# Altium PCB L-LRMAM36-FANN4-DK01_PCB.PcbDoc (part 3 of 3)
Units mm, origin at the board's own origin, x right, y up, seen from the top; angles counter-clockwise.
Board outline 54 x 90 mm, 4 copper layers (Top Layer, GND, VCC, Bottom Layer), stack 1.59 mm thick; 276 components, 168 nets, 833 pads, 804 vias.
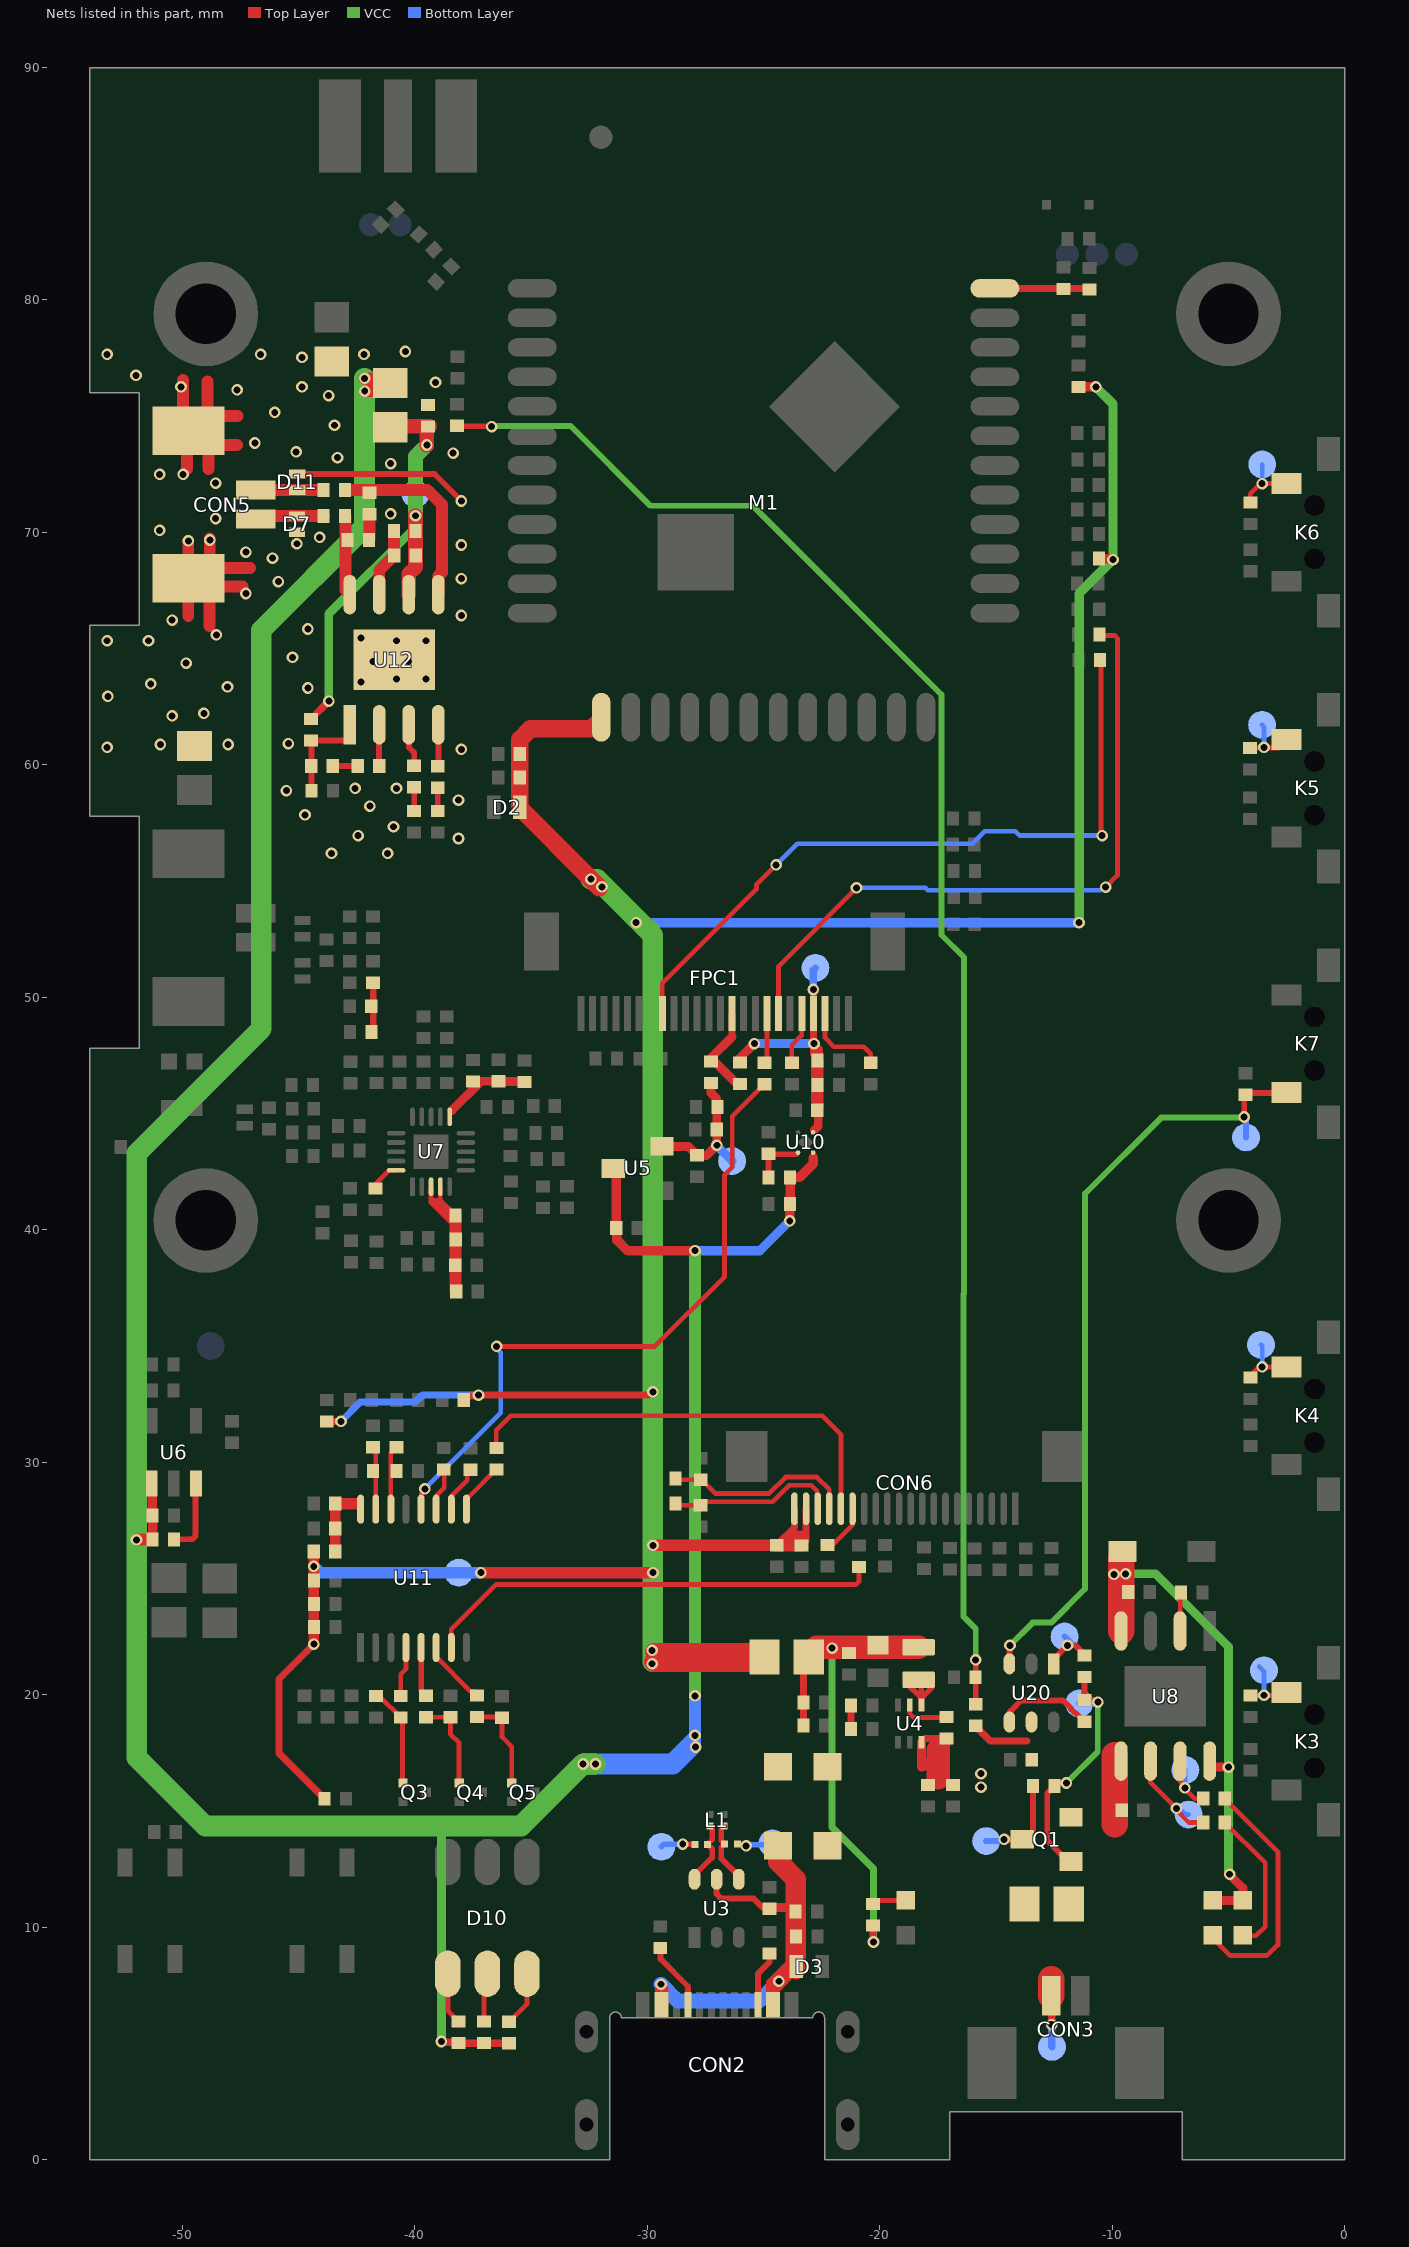
[diagram p5: the nets of this part, all layers, seen from the top]

## Via types
v1: diameter 0.5, hole 0.3, Top Layer to Bottom Layer, tented both sides, 804 vias

## Nets (pads, with @x,y where several pads share a name; then routed paths per layer and width w, separated by ;. In a path a pad name is that pad's centre, name@x,y a point inside that pad or via, vN(x,y) a via of type N, cw(c..) or ccw(c..) an arc to the next point about the centre after c; other vN are vias at no path point) (continued)
NetC45_2: C45.2 C46.2 C47.2 R53.2 U7.3 U7.4 | length 9.6
  Top Layer w0.203: U7.3@-39.306,41.857 -39.306,41.17 ; -39.172,41.184 -38.617,40.63 ; -39.01,41.215 C47.2@-38.455,40.66 ; U7.4@-38.906,41.857 -38.906,41.27 ; -38.196,40.06 -38.248,40.112 -38.751,40.615 ; -39.306,41.17 -39.206,41.27 -38.906,41.27 ; -39.306,41.17 -38.751,40.615 ; -38.906,41.27 C47.2@-38.251,40.615 -38.751,40.615
  Top Layer w0.508: C47.2@-38.251,40.615 -38.248,40.612 -38.248,40.112 C46.2@-38.248,39.576 -38.248,37.375 R53.2@-38.221,37.347
NetC48_2: C48.2 C49.2 R55.1 U7.11 | length 3.7
  Top Layer w0.381: U7.11@-38.41,45.129 -37.152,46.387 C49.2@-36.4,46.387 ; C49.2@-36.4,46.375 -35.248,46.375 R55.1@-35.235,46.362
NetC53_2: C53.2 C55.2 R64.1 U11.16 | length 4.4
  Top Layer w0.3: C55.2@-43.424,28.223 -43.428,28.227 -43.334,28.321 -42.418,28.321 -42.336,28.239 U11.16@-42.336,27.98 ; C55.2@-43.252,28.11 U11.16@-42.336,28.11
  Top Layer w0.432: R64.1@-43.428,26.158 C55.2@-43.428,28.227
NetC57_2: C57.2 R73.1 | length 1
  Top Layer w0.254: C57.2@-39.019,58.015 R73.1@-39.019,59.015
NetC58_2: C58.2 R95.1 | length 1
  Top Layer w0.254: C58.2@-40.032,58.009 R95.1@-40.032,59.034
NetC60_1: C60.1 R91.2 R92.1 | length 2.1
  Top Layer w0.279: R92.1@-41.871,48.508 -41.803,48.575 R91.2@-41.803,50.624
NetC66_2: C66.2 Q3.B R56.2 | length 4.3
  Top Layer w0.203: C66.2@-41.683,19.954 -41.549,19.954 -40.531,18.936 -40.531,16.213 Q3.B@-40.513,16.195
NetC67_2: C67.2 Q4.B R59.2 | length 4.1
  Top Layer w0.203: R59.2@-39.531,19.031 C67.2@-38.466,19.031 ; C67.2@-38.473,19.031 -38.473,18.301 -38.1,17.928 Q4.B@-38.1,16.2
NetC68_2: C68.2 Q5.B R61.2 | length 4
  Top Layer w0.203: R61.2@-37.329,19.038 -36.281,19.038 C68.2@-36.252,19.009 -36.252,18.179 -35.837,17.764 Q5.B@-35.837,16.254
NetC69_1: C69.1 R83.1 U11.15 | length 2.7
  Top Layer w0.203: R83.1@-41.811,30.643 -41.686,30.518 U11.15@-41.686,27.98
NetC70_2: C70.2 R84.1 U11.14 | length 2.8
  Top Layer w0.203: U11.14@-41.036,27.98 -41.036,30.393 R84.1@-40.786,30.643
NetC71_1: C71.1 CON6.17 R98.2 | length 8.2
  Top Layer w0.203: R98.2@-28.785,29.308 -28.719,29.243 C71.1@-27.705,29.243 ; C71.1@-27.682,29.266 -27.682,29.257 -27.083,28.658 -24.759,28.658 -24.055,29.362 -22.708,29.362 -22.175,28.829 CON6.17@-22.175,27.998
NetC79_2: C79.2 CON6.18 R100.2 | length 7.4
  Top Layer w0.203: R100.2@-28.795,28.224 -28.716,28.145 C79.2@-27.713,28.145 -27.556,28.302 -24.612,28.302 -23.907,29.007 -22.945,29.007 -22.69,28.752 -22.69,28.013 CON6.18@-22.675,27.998
NetC90_1: C90.1 U12.2 | length 1.8
  Top Layer w0.254: C90.1@-41.538,59.951 -41.538,61.724 U12.2@-41.535,61.726
NetC91_2: C91.2 R97.1 | length 1.1
  Top Layer w0.508: R97.1@-41.979,69.677 -41.961,69.695 C91.2@-41.961,70.784
NetCON2_A5: CON2.A5 R3.2 | length 3
  Top Layer w0.254: R3.2@-29.539,9.126 -29.438,9.025 -29.438,8.634 -28.25,7.446 CON2.A5@-28.25,6.65
NetCON2_B5: CON2.B5 R4.2 | length 2.5
  Top Layer w0.254: CON2.B5@-25.25,6.65 -25.25,7.998 -24.739,8.509 R4.2@-24.739,8.862 ; R4.2@-24.75,8.862 R4.2@-24.75,8.925
NetCON5_1: CON5.1 D11.K R25.2 | length 2.9
  Top Layer w0.508: CON5.1@-46.85,71.825 -46.845,71.83 R25.2@-43.939,71.83
NetCON5_2: CON5.2 D7.A R24.2 | length 3
  Top Layer w0.508: CON5.2@-46.85,70.575 -46.717,70.708 R24.2@-43.916,70.708
NetD10_1: D10.1 R18.1 | length 2.2
  Top Layer w0.203: D10.1@-38.582,8 -38.582,6.401 R18.1@-38.122,5.941
NetD10_2: D10.2 R19.1 | length 2.1
  Top Layer w0.203: R19.1@-37.025,5.935 -37.025,7.857 D10.2@-36.882,8
NetD10_3: D10.3 R21.1 | length 2.4
  Top Layer w0.203: R21.1@-35.945,5.929 -35.182,6.692 D10.3@-35.182,8
NetFPC1_3: FPC1.3 R110.2 | length 3.7
  Top Layer w0.203: FPC1.3@-22.358,49.3 -22.358,48.256 -21.975,47.873 -20.695,47.873 -20.391,47.569 R110.2@-20.391,47.184
NetFPC1_5: FPC1.5 R111.2 | length 2.3
  Top Layer w0.203: R111.2@-23.786,47.184 -23.786,47.933 -23.358,48.361 FPC1.5@-23.358,49.3
NetK3_1: K3.1 KEY3.1 R31.2 | length 2.8
  Top Layer w0.203: R31.2@-3.895,19.969 -3.481,19.969 v1(-3.475,19.975) ; v1@-3.475,19.969 -2.631,19.969 K3.1@-2.5,20.1
  Bottom Layer w0.203: KEY3.1@-3.683,21.209 -3.475,21.001 v1@-3.475,19.95
NetK4_1: K4.1 KEY4.1 R26.2 | length 2.8
  Top Layer w0.203: R26.2@-4.135,33.646 -3.681,34.1 v1(-3.55,34.1) K4.1@-2.5,34.1
  Bottom Layer w0.203: KEY4.1@-3.6,35.05 -3.55,35 v1(-3.55,34.1) v1@-3.55,34.075
NetK5_1: K5.1 KEY5.1 R28.1 | length 2.7
  Top Layer w0.203: R28.1@-4.144,60.723 R28.1@-4.068,60.723 v1@-3.5,60.723 ; v1(-3.475,60.75) -3.5,60.725 v1@-3.5,60.723 ; K5.1@-2.504,61.038 -2.819,60.723 v1@-3.5,60.723
  Bottom Layer w0.203: KEY5.1@-3.556,61.722 -3.475,61.641 v1@-3.475,60.825
NetK6_1: K6.1 KEY6.1 R29.2 | length 2.9
  Top Layer w0.203: R29.2@-4.064,71.283 -4.064,71.661 -3.625,72.1 v1(-3.55,72.1) K6.1@-2.5,72.1
  Bottom Layer w0.203: v1@-3.575,72.2 -3.55,72.225 KEY6.1@-3.55,72.925
NetL2_1: L2.1 U4.4 | length 3
  Top Layer w0.241: L2.1@-18.783,20.58 -18.783,20.427 -18.252,19.896 ; L2.1@-18.336,20.638 -18.214,20.516 U4.4@-18.214,19.552 ; -18.209,19.856 -17.77,20.295 L2.1@-17.77,20.598
NetLED1_A: LED1.A R10.1 | length 1.5
  Top Layer w0.203: R10.1@-20.299,10.998 -20.147,11.15 LED1.A@-18.893,11.15
NetLED2_K: LED2.K R86.2 | length 10.4
  Top Layer w0.203: LED2.K@-5.475,9.525 -5.475,9.325 -4.925,8.775 -3.35,8.775 -2.9,9.225 ; R86.2@-5.162,15.525 -2.875,13.238 -2.875,9.225
NetLED3_K: LED3.K R36.2 | length 6.3
  Top Layer w0.203: R36.2@-5.162,14.5 -3.425,12.763 -3.425,10.025 -3.825,9.625 LED3.K@-4.35,9.625
NetLED-2_1: LED-2.1 R86.1 U8.7 | length 3
  Top Layer w0.203: U8.7@-7.082,17.139 -7.082,16.246 v1@-6.955,16.12 ; v1@-7,16.075 -6.45,15.525 R86.1@-6.088,15.525
  Bottom Layer w0.203: v1(-6.876,15.995) -6.858,16.013 LED-2.1@-6.858,16.764
NetLED-3_1: LED-3.1 R36.1 U8.6 | length 4.6
  Top Layer w0.203: U8.6@-8.352,17.139 -8.368,17.122 -8.368,16.242 v1(-7.239,15.113) ; v1@-7.275,15.075 -6.7,14.5 R36.1@-6.088,14.5
  Bottom Layer w0.203: v1(-7.239,15.113) -7.112,15.113 -6.84,14.841 LED-3.1@-6.713,14.841
NetOUT1_1: OUT1.1 R62.2 U20.1 | length 2.3
  Top Layer w0.254: U20.1@-12.525,21.325 -12.525,21.525 v1(-11.925,22.125) -11.588,22.125 R62.2@-11.275,21.812
  Bottom Layer w0.254: OUT1.1@-12.05,22.5 -11.825,22.275 -11.825,22.225 v1(-11.925,22.125)
NetR5_1: R5.1 U4.5 | length 1.8
  Top Layer w0.203: U4.5@-18.714,19.552 -18.714,19.179 -18.558,19.023 R5.1@-17.321,19.023
NetR6_2: R6.2 TP1.1 | length 1.5
  Top Layer w0.241: v1(-28.479,13.572) -28.473,13.566 -27.988,13.566 -27.98,13.558 R6.2@-27.98,13.557
  Bottom Layer w0.241: TP1.1@-29.4,13.458 -29.286,13.572 v1(-28.479,13.572)
NetR7_1: R7.1 TP2.1 | length 1.5
  Top Layer w0.241: R7.1@-26.075,13.572 -26.064,13.562 -25.762,13.562 -25.75,13.55 v1(-25.75,13.5)
  Bottom Layer w0.241: v1(-25.75,13.5) -25.698,13.552 -24.704,13.552 TP2.1@-24.664,13.512
NetR11_1: R11.1 R12.2 | length 1
  Top Layer w0.305: R11.1@-21.238,18.4 R12.2@-21.238,19.4
NetR15_1: R15.1 U6.3 | length 3.2
  Top Layer w0.254: R15.1@-50.36,26.684 -49.582,26.684 -49.433,26.833 -49.433,29.074 U6.3@-49.422,29.084
NetR35_2: R35.2 U7.20 | length 1.3
  Top Layer w0.203: R35.2@-41.696,41.776 -41.696,41.97 -41.11,42.556 U7.20@-40.806,42.556
NetR71_1: R71.1 U20.4 | length 4.1
  Top Layer w0.254: U20.4@-14.375,18.95 -14.375,19.3 -13.925,19.75 -12.113,19.75 -11.779,19.417 -11.779,19.384 -11.616,19.221 -11.583,19.221 R71.1@-11.2,18.837
NetR73_2: R73.2 U12.4 | length 1.8
  Top Layer w0.254: R73.2@-39.019,59.94 -38.995,59.964 U12.4@-38.995,61.726
NetR75_1: R75.1 R94.2 R96.2 U12.1 | length 4.4
  Top Layer w0.254: R94.2@-44.454,58.886 -44.454,59.957 -44.454,61.032 R75.1@-44.472,61.05 -42.953,61.05 -42.805,61.198 U12.1@-42.805,61.726
NetR85_2: R85.2 U8.2 | length 1.7
  Top Layer w0.203: U8.2@-7.082,22.739 -7.082,24.362 R85.2@-7.048,24.396
NetR87_1: R87.1 R89.2 U10.3 | length 2.1
  Top Layer w0.254: R89.2@-24.798,43.274 -24.798,42.262 R87.1@-24.787,42.251 ; R89.2@-24.65,43.247 -23.594,43.247
NetR95_2: R95.2 U12.3 | length 1.9
  Top Layer w0.254: U12.3@-40.265,61.726 -40.252,61.714 -40.252,60.745 -40.032,60.524 R95.2@-40.032,59.959
OUTN: C91.1 R25.1 U12.5 | length 8.4
  Top Layer w0.508: R25.1@-43.014,71.83 -39.469,71.83 -38.84,71.201 -38.84,68.28 -38.987,68.133 -38.987,67.335 U12.5@-38.995,67.326
OUTP: R24.1 R97.2 U12.8 | length 3.5
  Top Layer w0.508: R24.1@-42.991,70.708 -42.991,67.513 U12.8@-42.805,67.326
P0: R56.1 U11.4 | length 2.2
  Top Layer w0.203: R56.1@-40.61,19.941 -40.61,20.873 -40.386,21.098 U11.4@-40.386,22.03
P1: R59.1 U11.5 | length 2.2
  Top Layer w0.241: U11.5@-39.736,22.03 -39.736,20.161 R59.1@-39.531,19.956
P2: R61.1 U11.6 | length 2.7
  Top Layer w0.203: U11.6@-39.086,22.03 -39.086,21.626 -37.594,20.135 R61.1@-37.429,20.135
P3: R67.2 U11.7 | length 19.8
  Top Layer w0.203: U11.7@-38.436,22.03 -38.436,22.81 -36.505,24.74 -21.018,24.74 -20.899,24.859 R67.2@-20.899,25.496
P4: R58.2 U11.9 | length 2.3
  Top Layer w0.203: U11.9@-37.786,27.98 -37.786,28.429 -37.711,28.504 -37.687,28.504 R58.2@-36.5,29.691
P5: R60.2 U11.10 | length 2
  Top Layer w0.203: U11.10@-38.436,27.98 -38.417,27.999 -38.417,28.557 -37.745,29.23 -37.745,29.542 R60.2@-37.609,29.678
P6: R69.2 U11.11 | length 1.9
  Top Layer w0.203: U11.11@-39.086,27.98 -39.067,27.999 -39.067,28.572 -38.74,28.899 -38.74,29.672 R69.2@-38.761,29.693
P7: R101.2 U11.12 | length 28.6
  Top Layer w0.203: U11.12@-39.736,27.98 -39.717,27.999 -39.717,28.63 -39.57,28.778 v1(-39.57,28.858) ; v1(-36.486,34.982) -29.681,34.982 -26.68,37.983 -26.68,42.367 -26.354,42.693 -26.354,44.879 -25.167,46.065 -25.167,46.103 -25.006,46.263 R101.2@-24.969,46.263
  Bottom Layer w0.203: v1(-39.57,28.858) -36.303,32.124 -36.303,34.719 -36.486,34.901 v1(-36.486,34.982)
PAGND: C81.1 C86.2 C87.2 C90.2 CON5.0 D7.K D11.A R88.1 R90.2 R96.1 U12.0 U12.7 | length 31
  Top Layer w0.241: D11.A@-45.063,72.511 -39.159,72.511 v1(-38,71.352) ; R96.1@-43.537,59.957 -43.531,59.951 C90.2@-42.463,59.951
  Top Layer w0.508: CON5.0@-49.978,74.945 -49.978,76.56 ; -49.811,72.728 CON5.0@-49.811,74.343 ; -49.75,66.41 CON5.0@-49.75,68.025 v1(-49.75,69.64) ; CON5.0@-49.27,73.758 -47.655,73.758 ; CON5.0@-49.251,75.008 -47.636,75.008 ; CON5.0@-49.019,67.679 -47.404,67.679 ; CON5.0@-48.925,74.875 -48.925,76.49 ; -48.878,72.73 CON5.0@-48.878,74.345 ; -48.839,65.978 CON5.0@-48.839,67.594 ; CON5.0@-48.824,68.119 v1@-48.824,69.734 ; CON5.0@-48.709,68.473 -47.094,68.473 ; U12.7@-41.535,67.326 -41.535,68.374 -40.94,68.969 -40.903,68.969 -40.894,68.978 C87.2@-40.894,69.015 ; C87.2@-40.897,69.019 C86.2@-40.897,70.057
  other v1: -43.588,56.195 -41.175,56.195 -38.127,56.83 -42.445,56.957 -40.921,57.338 -44.731,57.846 -41.937,58.227 -38.127,58.481 -45.529,58.893 -42.572,58.989 -40.794,58.989 -38,60.67 -53.24,60.751 -50.954,60.878 -48.033,60.878 -45.445,60.91 -50.445,62.11 -49.079,62.214 -53.213,62.95 -44.604,63.307 -48.063,63.357 -51.365,63.484 -42.318,63.561 -40.794,63.688 -39.524,63.688 -49.841,64.373 -41.81,64.45 -40.286,64.45 -45.269,64.627 -53.24,65.339 -51.462,65.339 -40.794,65.339 -39.524,65.339 -42.318,65.466 -48.541,65.593 -44.604,65.847 -50.446,66.228 -38,66.427 -47.271,67.371 -45.874,67.879 -38,68.011 -46.128,68.895 -47.271,69.149 -38,69.459 -45.077,69.512 -48.824,69.675 -44.096,69.784 -50.984,70.088 -48.571,70.596 -41.048,70.8 -48.571,72.12 -50.984,72.501 -49.968,72.501 -41.048,72.959 -43.334,73.213 -38.354,73.406 -45.112,73.467 -46.89,73.848 -43.461,74.61 -46.031,75.168 -43.715,75.88 -47.652,76.134 -50.065,76.261 -44.858,76.261 -39.115,76.455 -52,76.754 -44.858,77.531 -53.24,77.658 -46.636,77.658 -42.191,77.658 -40.413,77.785
PCLK: FPC1.17 R105.1 | length 30.7
  Top Layer w0.203: FPC1.17@-29.358,49.3 -29.358,50.607 -25.303,54.662 -25.303,54.859 v1(-24.461,55.7) ; R105.1@-10.523,64.48 -10.482,64.439 -10.482,57.003 v1(-10.438,56.958)
  Bottom Layer w0.203: v1(-24.461,55.7) -23.55,56.612 -16.031,56.612 -15.497,57.146 -14.172,57.146 -13.984,56.958 v1(-10.438,56.958)
POWER_EN: OUT2.1 Q1.G R62.1 R71.2 R112.2 | length 11.6
  Top Layer w0.254: v1(-11.975,16.2) -12.362,16.2 R112.2@-12.487,16.075 -12.8,15.762 -12.8,13.725 Q1.G@-11.825,12.75 ; R62.1@-11.25,20.725 -11.2,20.675 R71.2@-11.2,19.763 -10.713,19.763 v1(-10.625,19.675)
  VCC w0.254: v1(-11.975,16.2) -10.625,17.55 v1(-10.625,19.675)
  Bottom Layer w0.254: v1@-10.7,19.675 -11.375,19.675 OUT2.1@-11.425,19.625 -10.675,19.625 v1(-10.625,19.675)
POWER_KEY: C2.2 K7.2 KEY7.1 U20.3 | length 34.1
  Top Layer w0.254: U20.3@-14.425,21.325 -14.425,22.1 v1(-14.4,22.125) ; v1(-4.325,44.85) -4.325,45.875 -2.525,45.875 K7.2@-2.5,45.9
  VCC w0.254: v1(-14.4,22.125) -13.425,23.1 -12.625,23.1 -11.175,24.55 -11.175,39.443 -11.173,39.445 -11.173,41.552 -7.9,44.825 v1@-4.275,44.825
  Bottom Layer w0.254: v1@-4.3,44.85 -4.25,44.8 KEY7.1@-4.25,43.975
PWDN: FPC1.8 R101.1 | length 2.2
  Top Layer w0.203: R101.1@-24.969,47.188 -24.858,47.299 FPC1.8@-24.858,49.3
TP_INT: CON6.15 R57.1 | length 2.1
  Top Layer w0.203: R57.1@-22.261,26.434 -22.056,26.434 -21.175,27.315 CON6.15@-21.175,27.998
TP_RST: CON6.16 R58.1 | length 19.4
  Top Layer w0.203: R58.1@-36.5,30.616 -36.5,31.383 -35.879,32.004 -22.479,32.004 -21.675,31.2 CON6.16@-21.675,27.998
USB2_N: L1.2 R7.2 U3.4 | length 2.8
  Top Layer w0.241: L1.2@-26.707,14.351 -26.82,14.238 -26.82,13.72 R7.2@-26.675,13.575 -26.824,13.426 -26.824,12.946 -26.071,12.193 U3.4@-26.071,12.061
USB2_P: L1.3 R6.1 U3.6 | length 2.8
  Top Layer w0.241: U3.6@-27.971,12.061 -27.971,12.236 -27.218,12.989 -27.218,13.37 R6.1@-27.409,13.561 -27.214,13.756 -27.214,14.258 L1.3@-27.307,14.351
V3P3: C13.2 C14.2 C15.2 L2.2 R8.2 R10.2 R13.2 | length 21.9
  Top Layer w0.305: R8.2@-23.283,18.679 C13.2@-23.283,19.67 ; C13.2@-23.28,19.67 -23.28,21.401 R13.2@-23.057,21.625 ; R10.2@-20.299,10.073 -20.299,9.36 v1(-20.271,9.36)
  Top Layer w1.016: R13.2@-22.975,21.775 -22.712,22.038 L2.2@-18.336,22.038
  VCC w0.305: v1(-22.05,22) -22.05,14.29 -20.271,12.511 v1(-20.271,9.36)
V5P0: C16.2 C17.2 C24.2 C29.2 C78.2 C83.2 D1.K D5.K D6.K LED2.A LED3.A R5.2 R15.2 R18.2 R19.2 R21.2 R87.2 R103.2 U4.3 U5.3 U6.1 U8.4 U8.8 U10.4 | length 174.1
  Top Layer w0.305: v1(-38.862,5.08) -38.83,5.048 -38.154,5.048 R18.2@-38.122,5.016 -38.11,5.004 R21.2@-35.945,5.004 ; U4.3@-18.214,17.952 -18.054,18.111 R5.2@-17.128,18.111
  Top Layer w0.381: -18.214,16.891 U4.3@-18.214,17.952 ; -18.116,16.916 -17.128,17.904 R5.2@-17.128,18.074 ; U8.8@-5.812,16.865 -5.794,16.883 v1(-4.999,16.883) v1@-4.99,16.874 ; LED2.A@-5.691,11.159 LED2.A@-5.682,11.15 LED3.A@-4.382,11.15 -4.382,11.682 v1@-5,12.3
  Top Layer w0.406: U6.1@-51.322,29.084 -51.303,29.066 -51.303,27.728 -51.322,27.709 -51.285,27.672 R15.2@-51.285,26.722 ; R15.2@-51.297,26.672 R15.2@-51.285,26.684 ; R103.2@-41.409,76.075 R103.2@-41.063,76.422 ; U5.3@-31.47,42.637 -31.342,42.51 C24.2@-31.342,40.077 ; C24.2@-31.379,40.04 -31.309,39.97 -31.309,39.557 -30.85,39.098 v1(-27.952,39.098) ; v1(-23.876,40.386) -23.869,40.393 -23.869,41.094 C83.2@-23.862,41.101 ; C83.2@-23.862,41.235 R87.2@-23.862,42.251 -23.456,42.251 -22.871,42.836 -22.871,43.105
  Top Layer w0.508: v1@-51.966,26.672 R15.2@-51.297,26.672 ; v1(-42.167,76.626) -41.267,76.626 R103.2@-41.063,76.422 ; v1(-42.159,76.075) R103.2@-41.409,76.075 ; -41.842,76.409 R103.2@-41.091,76.409 ; D6.K@-9.712,25.781 -9.622,25.871 -9.554,25.939 D6.K@-9.554,26.162
  Top Layer w1.016: -17.491,16.429 -17.491,17.608
  Top Layer w1.143: U8.4@-9.622,22.739 D6.K@-9.622,25.871
  VCC w0.305: -38.923,14.352 -38.862,14.352
  VCC w0.381: v1(-38.862,5.08) -38.862,14.352 ; v1(-9.425,25.2) -9.424,25.199 -8.141,25.199 -4.999,22.057 v1(-4.999,16.883) -4.999,12.324 v1(-4.95,12.275)
  VCC w0.508: v1(-27.952,39.098) -27.952,19.952 v1(-27.95,19.95)
  VCC w0.889: v1(-42.167,76.626) -42.167,70.228 -46.609,65.786 -46.609,48.641 -51.965,43.285 -51.965,17.294 -49.023,14.352 -38.923,14.352 ; -38.862,14.352 -35.432,14.352 v1(-32.766,17.018) v1(-32.232,17.018)
  Bottom Layer w0.406: v1(-27.952,39.098) -25.164,39.098 v1(-23.876,40.386)
  Bottom Layer w0.508: -29.375,17.15 -29.05,17.15 ; -28.675,17.075 v1@-27.95,17.8 ; -28.312,17.888 v1(-27.95,18.25) ; v1(-27.95,19.95) -27.95,18.26 -27.94,18.25 v1@-27.94,17.835
  Bottom Layer w0.889: v1(-32.766,17.018) v1(-32.232,17.018) -28.907,17.018 -28.175,17.75
  other v1: -15.65,16.025 -15.65,16.6 -27.925,17.75 -9.925,25.175 -51.978,26.661
VBAT_ADC: R113.1 R114.1 R115.2 | length 69.7
  Top Layer w0.254: R113.1@-38.197,74.586 -38.179,74.568 -36.722,74.568 v1(-36.703,74.549) ; R114.1@-15.875,19.588 -15.875,21.4 v1@-15.825,21.45
  VCC w0.254: v1(-36.703,74.549) -36.666,74.586 -33.311,74.586 -29.871,71.146 -25.471,71.146 -17.345,63.02 -17.345,52.684 -16.382,51.722 -16.382,37.259 -16.407,37.234 -16.407,23.373 -15.875,22.84 v1(-15.875,21.5)
VBAT_Li: C1.2 C80.2 CON3.1 Q1.S R72.1 R114.2 TP_VBAT1.1 U8.5 U20.5 | length 8.4
  Top Layer w0.3: R114.2@-15.85,18.725 -15.85,18.6 -15.25,18 -13.675,18
  Top Layer w0.305: CON3.1@-12.625,7.05 -12.606,7.031 v1(-12.606,5.802)
  Top Layer w1.143: CON3.1@-12.625,7.05 CON3.1@-12.625,7.748 ; -9.896,14.417 U8.5@-9.896,17.391
  Bottom Layer w0.305: v1(-12.606,5.802) -12.606,4.863 TP_VBAT1.1@-12.593,4.85
VBUS2: C10.2 C11.2 C12.2 CON2.A4 CON2.A9 CON2.B4 CON2.B9 D3.K D5.A U3.5 | length 25.8
  Top Layer w0.254: U3.5@-27.021,12.061 -27.021,11.428 -26.818,11.225 -25.425,11.225 -25.012,10.812 C12.2@-24.75,10.812 ; -24.768,7.459 -24.75,7.441 -24.75,7.192 CON2.B4@-24.75,6.65 ; CON2.A9@-24.45,6.65 -24.45,7.289 -24.45,7.492 -24.45,7.565 v1(-24.343,7.672)
  Top Layer w0.279: CON2.A4@-29.527,6.65 -29.527,7.431 v1(-29.415,7.543) -29.227,7.354 CON2.B9@-29.227,6.65 ; -24.468,7.271 -24.45,7.289 D3.K@-23.641,8.099 ; v1(-24.343,7.672) -23.614,8.402 D3.K@-23.516,8.499 ; v1@-24.307,7.635 -24.45,7.492 -24.75,7.192 -24.768,7.174 -24.768,7.459 ; -24.238,7.989 -24.768,7.459 ; D3.K@-23.614,8.071 D3.K@-23.48,8.205 ; -23.362,9.016 -23.614,8.765 -24.768,7.61 -24.768,7.459
  Top Layer w0.381: C12.2@-24.562,10.85 -23.804,10.85 C11.2@-23.622,10.668 C11.2@-23.749,10.795
  Top Layer w0.889: D5.A@-24.375,13.5 -24.375,12.825 -23.614,12.064 -23.614,11.037 -23.614,10.668 -23.614,9.59 -23.614,8.765 -23.614,8.402 D3.K@-23.614,8.202
  Bottom Layer w0.635: v1(-29.415,7.543) -28.689,6.817 -25.199,6.817 v1(-24.343,7.672)
VCC_1V8: C25.2 C88.1 C89.2 R23.2 U5.2 VDD_1V8.1 | length 6.4
  Top Layer w0.381: U5.2@-29.37,43.587 -28.245,43.587 C25.2@-27.86,43.202 -27.447,43.202 v1(-27.014,43.636) -27.014,45.635 -27.27,45.891 R23.2@-27.27,46.308
  Bottom Layer w0.381: v1(-27.014,43.636) -27.014,43.617 VDD_1V8.1@-26.354,42.957
VCC_2V8: C82.2 C84.1 C85.2 FPC1.4 R22.2 U10.1 VDD_2V8.1 | length 13.5
  Top Layer w0.305: v1(-22.863,50.337) -22.858,50.332 FPC1.4@-22.858,49.3 -22.858,47.534 C85.2@-22.611,47.287 ; v1(-22.83,48.007) -22.595,47.772 C85.2@-22.595,47.287
  Top Layer w0.381: R22.2@-26.057,47.221 -26.057,47.349 v1(-25.4,48.006) ; -22.821,44.292 -22.652,44.461 -22.652,45.266 -22.615,45.302 -22.615,47.178 -22.611,47.182 C85.2@-22.611,47.287 ; -22.776,45.553 C85.2@-22.776,47.429
  Bottom Layer w0.305: v1(-22.863,50.337) -22.863,51.177 VDD_2V8.1@-22.772,51.267
  Bottom Layer w0.381: v1(-25.4,48.006) -25.399,48.007 v1(-22.83,48.007)
VCC_IO: FPC1.11 R22.1 R23.1 | length 4.3
  Top Layer w0.3: R23.1@-27.19,47.236 -27.126,47.236 -27.106,47.236 R23.1@-27.067,47.236 ; -26.358,48.303 FPC1.11@-26.358,49.3
  Top Layer w0.381: R23.1@-27.27,47.233 R23.1@-27.27,47.27 ; R23.1@-27.126,47.221 -27.126,47.236 R23.1@-27.126,47.257 ; -26.358,48.303 -27.27,47.391 R23.1@-27.27,47.27 ; R22.1@-26.022,46.275 -26.094,46.347 -26.217,46.347 -27.106,47.236 R23.1@-27.126,47.257 ; R23.1@-27.27,47.27 -27.14,47.27 R23.1@-27.126,47.257
VDD_3V3: C8.2 C9.2 C76.1 C77.1 CON6.19 CON6.20 D2.K M1.13 R13.1 R20.2 R33.2 R34.2 R37.1 R50.2 R64.2 R78.2 R80.2 R82.2 VDD_WiFi.1 | length 154.7
  Top Layer w0.305: v1(-44.348,22.173) -45.847,20.674 -45.847,17.48 R37.1@-43.889,15.523 ; R33.2@-43.789,31.748 -43.187,31.748 v1(-43.18,31.755) ; R34.2@-37.897,32.668 -37.897,32.705 -37.787,32.815 -37.749,32.815 -37.718,32.847 -37.301,32.847 v1(-37.264,32.884) -37.251,32.896 -29.948,32.896 -29.816,33.028 v1(-29.763,33.028) ; C77.1@-24.436,26.427 -23.675,27.188 CON6.20@-23.675,27.998 ; -24.053,26.65 C76.1@-23.525,26.65 ; -23.815,26.916 -23.259,26.916 ; -23.749,26.427 C76.1@-23.525,26.65 ; C76.1@-23.368,26.416 -23.22,26.526 cw(c-22.934,26.423) -23.175,26.609 -23.175,27 ; C76.1@-23.242,26.65 C76.1@-23.525,26.65 ; CON6.19@-23.175,27.998 -23.175,27 ; C76.1@-23.525,26.65 -23.259,26.916 ; -23.259,26.916 -23.175,27
  Top Layer w0.406: M1.13@-32.053,62.118 M1.13@-31.985,62.05 ; R20.2@-11.463,76.261 v1(-10.709,76.261) ; R50.2@-10.574,68.871 -10.014,68.871 v1(-9.97,68.828)
  Top Layer w0.457: R64.2@-44.354,26.158 v1(-44.354,25.519) -44.354,22.91 R78.2@-44.348,22.905 v1(-44.348,22.173)
  Top Layer w0.508: v1(-37.163,25.248) v1(-29.759,25.248) ; v1(-29.759,26.427) -24.444,26.427 C77.1@-24.436,26.419 ; C77.1@-24.436,26.416 C76.1@-23.368,26.416
  Top Layer w0.762: D2.K@-35.496,58.178 -35.496,58.15 v1(-32.429,55.084) v1@-32.069,54.723 ; D2.K@-35.493,58.178 C9.2@-35.493,59.459 C8.2@-35.493,60.475 -35.493,61.086 -35.03,61.549 -32.404,61.549 M1.13@-31.985,61.968 ; v1@-29.763,21.418 -29.697,21.352 R13.1@-25.128,21.352 ; v1@-29.716,21.844 -25.176,21.844 R13.1@-24.957,21.625
  VCC w0.406: v1(-11.43,53.213) -11.43,67.368 v1(-9.97,68.828) -9.97,75.522 v1(-10.709,76.261)
  VCC w0.889: v1(-32.429,55.084) -32.17,55.084 -30.393,53.306 -29.763,52.677 v1@-29.763,33.073 ; v1@-29.763,21.418 -29.763,21.91 v1@-29.763,32.983
  Bottom Layer w0.305: v1(-43.18,31.755) -42.351,32.584 -39.984,32.584 -39.684,32.884 v1(-37.264,32.884)
  Bottom Layer w0.406: v1(-30.485,53.214) -30.483,53.213 v1(-11.43,53.213)
  Bottom Layer w0.508: v1(-44.354,25.519) -44.083,25.248 VDD_WiFi.1@-38.113,25.248 v1(-37.163,25.248)
  other v1: -29.793,21.331 -29.795,21.91 -31.953,54.75
VDD_PA: C81.2 C86.1 C87.1 R75.2 R103.1 U12.6 VDD_PA.1 | length 20.5
  Top Layer w0.305: R75.2@-44.472,61.975 v1(-43.707,62.74)
  Top Layer w0.635: R103.1@-40.886,74.59 -40.865,74.569 C81.2@-39.362,74.569 ; U12.6@-40.265,67.326 -40.265,68.213 -39.972,68.505 C86.1@-39.972,70.057 -39.974,70.059 v1(-39.974,70.716) ; v1(-39.489,73.762) C81.2@-39.489,74.442
  VCC w0.381: v1(-43.707,62.74) -43.707,66.493 -39.974,70.226 v1(-39.974,70.716)
  VCC w0.635: v1(-39.974,70.716) -39.974,73.276 v1(-39.489,73.762)
  Bottom Layer w0.508: v1(-39.974,70.716) VDD_PA.1@-39.974,71.655
VDD_VBAT: D1.A Q1.D R72.2 R112.1 VDD_VBAT.1 | length 4.1
  Top Layer w0.254: v1(-14.65,13.775) Q1.D@-13.875,13.775 ; Q1.D@-13.575,13.625 -13.413,13.787 R112.1@-13.413,16.075
  Bottom Layer w0.254: VDD_VBAT.1@-15.425,13.7 -14.8,13.7 v1@-14.65,13.85
VSYNC: FPC1.7 R99.1 | length 29.3
  Top Layer w0.203: FPC1.7@-24.358,49.3 -24.358,51.334 -21.005,54.687 v1(-21.005,54.713) ; R99.1@-10.456,65.566 -9.898,65.566 -9.779,65.446 -9.779,55.245 v1(-10.287,54.737)
  Bottom Layer w0.203: v1(-21.005,54.713) -18.04,54.713 -17.936,54.608 -10.496,54.608 -10.367,54.737 v1(-10.287,54.737)
WiFi_RF: C26.2 M1.36 R30.1 | length 4.1
  Top Layer w0.305: M1.36@-15.05,80.5 -11.088,80.5 cw(c-11.088,80.344) R30.1@-10.977,80.454
pads on no net: BM1.2 CON2. CON2.A8 CON2.B8 CON6.3 CON6.4 CON6.11 D2. D3. D7. D8. D9. D10. D11. D12. FPC1.1 FPC1.10 FPC1.23 FPC1.24 H300.1 H301.1 H302.1 H303.1 K3.NC K4.NC K5.NC K6.NC K7.NC M1. MK1.1 MK1.2 Oil1.29 Q1. U4. U5. U7. U8. U10. U11. U11.13 U12. U20.6

## Polygon pours and split planes (outlines as drawn)
GND on Top Layer "NONET_L-01_P-001" (solid, remove dead copper, pour order 10): -54,90 0,90 0,0 -54,0 -54,23.745 -46.446,23.745 -46.446,35.514 -46.186,35.775 -34.71,35.775 -32.735,37.75 -32.735,47.658 -35.333,50.256 -35.333,54.29 -36.857,55.814 -36.857,76.079 -39.339,78.562 -53.913,78.562 -54,78.648
MIC_N on Top Layer "NONET_L-01_P-001" (solid, remove dead copper, pour order 3): -54,59.517 -49.177,59.517 -44.585,54.925 -36.965,54.925 -36.38,54.34 -36.38,50.276 -33.468,47.363 -33.468,38.378 -35.219,36.627 -46.264,36.627 -47.129,35.762 -47.129,24.318 -54,24.318 -54,58.488
PAGND on Top Layer "Top Layer-PAGND" (solid, remove dead copper, pour order 2): -48.318,60.182 -43.823,55.687 -38.254,55.687 -37.738,56.202 -37.738,75.799 -40.029,78.09 -54,78.09 -54,60.182
GND on GND "NONET_L-01_P-001" (solid, remove dead copper, pour order 11): -54,90 0,90 0,0 -54,0 -54,23.745 -46.446,23.745 -46.446,35.514 -46.186,35.775 -34.71,35.775 -32.716,37.769 -32.716,47.64 -35.732,50.656 -35.732,54.69 -36.857,55.814 -36.857,76.079 -39.339,78.562 -53.913,78.562 -54,78.648
PAGND on GND "Top Layer-PAGND" (solid, remove dead copper, pour order 18): -48.318,60.182 -43.823,55.687 -38.254,55.687 -37.738,56.202 -37.738,75.799 -40.029,78.09 -54,78.09 -54,60.182
MIC_N on GND "NONET_L-01_P-001" (solid, remove dead copper, pour order 14): -54,59.517 -49.177,59.517 -44.585,54.925 -36.965,54.925 -36.38,54.34 -36.38,50.276 -33.468,47.363 -33.468,38.378 -35.219,36.627 -46.264,36.627 -47.129,35.762 -47.129,24.318 -54,24.318 -54,58.488
GND on VCC "NONET_L-01_P-001" (solid, remove dead copper, pour order 17): -54,90 0,90 0,0 -54,0 -54,23.745 -46.446,23.745 -46.446,35.514 -46.186,35.775 -34.71,35.775 -32.716,37.769 -32.716,47.64 -35.732,50.656 -35.732,53.692 -36.857,54.816 -36.857,76.079 -39.339,78.562 -53.913,78.562 -54,78.648
PAGND on VCC "Top Layer-PAGND" (solid, remove dead copper, pour order 19): -48.318,60.182 -43.823,55.687 -38.254,55.687 -37.738,56.202 -37.738,75.799 -40.029,78.09 -54,78.09 -54,60.182
MIC_N on VCC "NONET_L-01_P-001" (solid, remove dead copper, pour order 15): -54,59.517 -49.177,59.517 -44.585,54.925 -36.965,54.925 -36.38,54.34 -36.38,50.276 -33.468,47.363 -33.468,38.378 -35.219,36.627 -46.264,36.627 -47.129,35.762 -47.129,24.318 -54,24.318 -54,58.488
MIC_N on VCC "NONET_L-01_P-001" (solid, remove dead copper, pour order 8): -54,58.516 -48.177,58.516 -44.585,54.925 -36.965,54.925 -36.38,54.34 -36.38,50.276 -33.468,47.363 -33.468,38.378 -35.219,36.627 -46.762,36.627 -47.129,36.26 -47.129,24.679 -54,24.679 -54,58.488
GND on Bottom Layer "NONET_L-01_P-001" (solid, remove dead copper, pour order 13): -54,90 0,90 0,0 -54,0 -54,23.745 -46.446,23.745 -46.446,35.514 -46.186,35.775 -34.71,35.775 -32.842,37.643 -32.842,47.765 -35.732,50.656 -35.732,54.69 -36.857,55.814 -36.857,76.079 -39.339,78.562 -53.913,78.562 -54,78.648
PAGND on Bottom Layer "Top Layer-PAGND" (solid, remove dead copper, pour order 20): -48.318,60.182 -43.823,55.687 -38.254,55.687 -37.738,56.202 -37.738,75.799 -40.029,78.09 -54,78.09 -54,60.182
MIC_N on Bottom Layer "NONET_L-01_P-001" (solid, remove dead copper, pour order 16): -54,59.517 -49.177,59.517 -44.585,54.925 -36.965,54.925 -36.38,54.34 -36.38,50.276 -33.468,47.363 -33.468,38.378 -35.219,36.627 -46.264,36.627 -47.129,35.762 -47.129,24.318 -54,24.318 -54,58.488

## Keep-outs
Keep-Out Layer:
  circle w0.2: c-3,3 r1.6
  circle w0.2: c-51,3 r1.6
  circle w0.2: c-51,87 r1.6
  lines w0.127: -34,58.55 ccw(c-33.7,58.55) -33.7,58.25 -20.3,58.25 ccw(c-20.3,58.55) -20,58.55 -20,58.95 ccw(c-20.3,58.95) -20.3,59.25 -33.7,59.25 ccw(c-33.7,58.95) -34,58.95 -34,58.55
  lines w0.2: -31.62,0 -36.38,0 -54,0 -54,47.8 -51.85,47.8 -51.85,57.8 -54,57.8 -54,66 -51.85,66 -51.85,76 -54,76 -54,90 0,90 0,0 -7,0 -7,2.05 -17,2.05 -17,0 -22.38,0

## Other copper
Top Layer:
  pour cut-out: -51,0.2 cw(c-51,3) -53.8,3 cw(c-51,3) -51,5.8 cw(c-51,3) -48.2,3 cw(c-51,3)
  pour cut-out: -3,0.2 cw(c-3,3) -5.8,3 cw(c-3,3) -3,5.8 cw(c-3,3) -0.2,3 cw(c-3,3)
  pour cut-out: -51,84.2 cw(c-51,87) -53.8,87 cw(c-51,87) -51,89.8 cw(c-51,87) -48.2,87 cw(c-51,87)
  pour cut-out: -6.275,10.925 -6.275,10.2 -6.15,10.075 -5.45,10.075 -5.375,10.15
  region net V5P0: -24.675,17.5 -20.05,17.5 -19.425,16.875 -15.45,16.875 -15.3,16.725 -15.3,15.925 -15.475,15.75 -20.525,15.75 -20.95,16.175 -25.4,16.175 -26.625,17.4 -27.975,17.4 -28.2,17.625 -28.2,18.375 -28.05,18.525 -25.7,18.525
  region net VDD_VBAT: -22.8,14.2 -22.675,14.325 -13.425,14.325 -13.3,14.2 -13.3,13.425 -13,13.125 -13,10.325 -13.15,10.175 -14.55,10.175 -14.675,10.3 -14.675,11.725 -15.75,12.8 -22.65,12.8 -22.8,12.95
  region net VBAT_Li: -13.2,5.875 -13.2,9.475 -12.525,10.15 -12.525,11.775 -12.375,11.925 -11.05,11.925 -10.85,12.125 -10.85,13.95 -11.15,14.25 -12.2,14.25 -12.3,14.35 -12.3,15.1 -11.475,15.925 -11.475,16.45 -11.85,16.825 -13.675,16.825 -13.825,16.975 -13.825,19.125 -13.675,19.275 -13.35,19.275 -13.15,19.075 -13.15,18.125 -12.925,17.9 -9.5,17.9 -9.4,17.8 -9.4,10.9 -12.075,8.225 -12.075,5.925 -12.475,5.525 -12.85,5.525
  pour cut-out: -45.53,9.33 -44.607,9.33 -44.607,7.917 -45.53,7.917
  pour cut-out: -45.53,13.48 -44.607,13.48 -44.607,12.067 -45.53,12.067
  pour cut-out: -52.93,13.48 -52.007,13.48 -52.007,12.067 -52.93,12.067
  pour cut-out: -52.93,9.33 -52.007,9.33 -52.007,7.917 -52.93,7.917
  pour cut-out: -51.183,47.541 -51.183,47.884 -48.684,47.884 -48.684,46.266
  pour cut-out: -48.965,47.044 -47.596,45.676 -47.817,45.455 -47.94,45.578 -48.965,45.578
  pour cut-out: -50.851,57.53 -47.843,57.53 -47.843,54.822 -50.851,54.822
  pour cut-out: -50.851,51.18 -47.65,51.18 -47.65,48.515 -50.851,48.515
  region net V5P0: -18.134,18.031 -18.092,17.989 -17.128,17.989 -17.128,17.904 -17.854,17.178 -18.15,17.178 -18.15,17.029 -18.163,17.016
  pour cut-out: -10.19,5.957 -7.429,5.957 -7.429,2.997 -10.19,2.997
  pour cut-out: -16.54,5.957 -13.779,5.957 -13.779,2.997 -16.54,2.997
  pour cut-out: -40.059,66.253 -38.789,66.253 -38.789,66.64 -39.383,67.234 -40.018,67.234
  pour cut-out: -36.486,34.982 -36.486,35.989 -36.407,36.068 -36.081,35.743 -36.081,35.386
  pour cut-out: -26.162,37.696 -25.695,37.229 -25.286,37.229 -25.286,37.183 -25.595,36.874 -25.983,37.262 -26.596,37.262
  pour cut-out: -36.779,36.793 -36.779,36.322 -36.996,36.322 -37.372,36.698 -37.059,37.01
  pour cut-out: -41.091,38.982 -40.454,38.982 -40.353,39.083 -40.554,39.285 -41.145,39.285
  pour cut-out: -40.275,62.841 -38.988,62.841 -39.345,62.484 -40.214,62.484
  pour cut-out: -8.626,18.253 -6.086,18.253 -5.969,18.136 -5.969,17.526 -8.239,17.526 -8.626,17.139
  pour cut-out: -3.728,10.496 -3.757,10.467 -3.757,10.175 -3.982,10.4 -4.195,10.4
  pour cut-out: -27.678,52 -27.108,51.43 -27.108,51.655 -27.328,51.875 -27.328,52.385
  pour cut-out: -43.386,89.49 -37.085,89.49 -37.085,90 -43.393,90
  pour cut-out: -36.773,89.858 -36.773,85.093 -38.225,85.093 -38.225,89.858
  pour cut-out: -44.484,90 -44.484,85.235 -43.033,85.235 -43.033,90
  pour cut-out: -21.869,72.093 -25.176,75.4 -21.945,78.631 -18.638,75.324
  pour cut-out: -29.903,71.08 -25.942,71.08 -25.942,67.14 -29.903,67.14
  pour cut-out: -50.851,69.38 -47.65,69.38 -47.65,66.715 -50.851,66.715
  pour cut-out: -50.851,75.73 -47.843,75.73 -47.843,73.022 -50.851,73.022
  pour cut-out: -44.82,45.706 -48.61,45.706 -48.61,47.541 -51.183,47.541 -51.183,44.775 -48.965,44.775
  pour cut-out: -39.46,85.235 -39.46,89.782 -39.678,90 -42.044,90 -42.044,85.235
  region net NetL2_1: -18.252,19.896 -18.783,20.427 -18.547,20.427 -18.336,20.638 -18.295,20.598 -17.77,20.598 -17.77,20.295
GND:
  pour cut-out: -39.46,85.235 -39.46,89.782 -39.678,90 -42.044,90 -42.044,85.235
VCC:
  region net V5P0: -15.925,16.875 -14.3,16.875 -13.15,18.025 -13.15,20.025 -10.25,22.925 -10.25,25.275 -10.05,25.475 -9.225,25.475 -9.05,25.3 -9.05,22.25 -11.975,19.325 -11.975,17.5 -13.725,15.75 -15.85,15.75 -16.075,15.975 -16.075,16.725
  pour cut-out: -16.338,44.908 -16.296,44.866 -15.048,44.866 -15.048,45.322 -15.158,45.212 -16.338,45.212
Multi-Layer:
  pour cut-out: -25.472,83.329 0,83.329 0,90 -25.472,90

## Silkscreen, mask and mechanical layers (free items; w line width, h text height)
Top Overlay:
  circle w0.15: c-3,3 r3
  circle w0.15: c-51,3 r3
  circle w0.15: c-51,87 r3
  region: -8.216,7.578 -9.74,7.578 -9.74,7.197 -8.216,7.197
  region: -14.404,6.691 -14.404,8.215 -14.785,8.215 -14.785,6.691
  rectangle: -15.367,7.239 -13.843,7.62
  text "SPK" at -53.475,79.254 h2.03 r270
  text "K1" at -2.125,74.95 h2.03
  text "K2" at -2.025,63.425 h2.03
  text "MIC" at -53.449,61.141 h2.03 r270
  text "CAMERA" at -28.909,56.245 h1.52
  text "N" at -47.144,55.551 h1.52 r270
  text "K3" at -1.975,52.475 h2.03
  text "P" at -47.117,50.927 h1.52 r270
  text "S/C" at -17.223,44.12 h1.52
  text "YYWW" at -21.449,44.103 h1.52
  text "V03" at -14.885,44.062 h1.52
  text "K4" at -2,36.825 h2.03
  text "LCD" at -29.221,32.138 h1.52
  text "K5" at -2,22.8 h2.03
  text "LED1" at -17.083,9.092 h1.52 r90
  text "RGB" at -33.776,9.091 h1.52
  text "LED3" at -2.549,9.055 h1.52 r90
  text "LED2" at -6.684,9 h1.52 r90
  text "REST" at -52.832,6.621 h1.52
  text "BOOT" at -45.691,6.51 h1.52
  text "BAT" at -18.782,3.409 h1.52
  text "USB" at -36.23,1.351 h1.52
Mechanical 1:
  circle w0.156: c-18.882,10.443 r3.5
  circle w0.156: c-4.882,10.443 r3.5
  circle w0.156: c-50.046,46.241 r2.5
  lines w0.05: -18.921,22.313 -18.921,41.998
  lines w0.127: -27,-6.223 -27,105.791
  lines w0.2: -42.113,10.414 -31.665,10.414 ; -31.665,10.4 2.122,10.4 ; -24.842,41.998 -13.001,41.998
Bottom Assembly:
  lines w0.127: -5,82.42 cw(c-5,79.42) -2,79.42 -2,40.42 cw(c-5,40.42) -5,37.42 -49,37.42 cw(c-49,40.42) -52,40.42 -52,79.42 cw(c-49,79.419) -49,82.419 -5,82.419 ; -5,82.419 ccw(c-5,82.42) -5,82.419
Mechanical 14:
  lines w0.127: -32.842,39.098 -24.842,39.098 -24.842,41.998 -32.169,41.998 -32.842,41.998 -32.842,39.098 ; -13.001,40.631 -13.001,43.431 -8.001,43.431 -8.001,40.631 -8.051,40.631 -13.001,40.631
  lines w0.149: -26.846,48.248 -26.846,53.748 -10.996,53.748 -10.996,48.248 -26.846,48.248

## Dimensions
-54,90 to 0,90 on Mechanical 1
-54,90 to -54,0 on Mechanical 1

## Text inside footprints (layer, text, board x,y; h text height)
CON6: Top Overlay "1" at -13.5,28.523 h1.2 r180; Top Overlay "20" at -24.05,28.473 h1.2 r180
D10: Top Overlay "R" at -37.322,10.1 h0.8 r270; Top Overlay "G" at -38.992,9.8 h0.8 r270; Top Overlay "B" at -35.522,9.68 h0.8 r270